# Altium PCB PCB1.PcbDoc
Units mm, origin at the board's own origin, x right, y up, seen from the top; angles counter-clockwise.
Board outline 43.94 x 44.83 mm, 2 copper layers (Top Layer, Bottom Layer); 126 components, 15 nets, 360 pads, 24 vias.
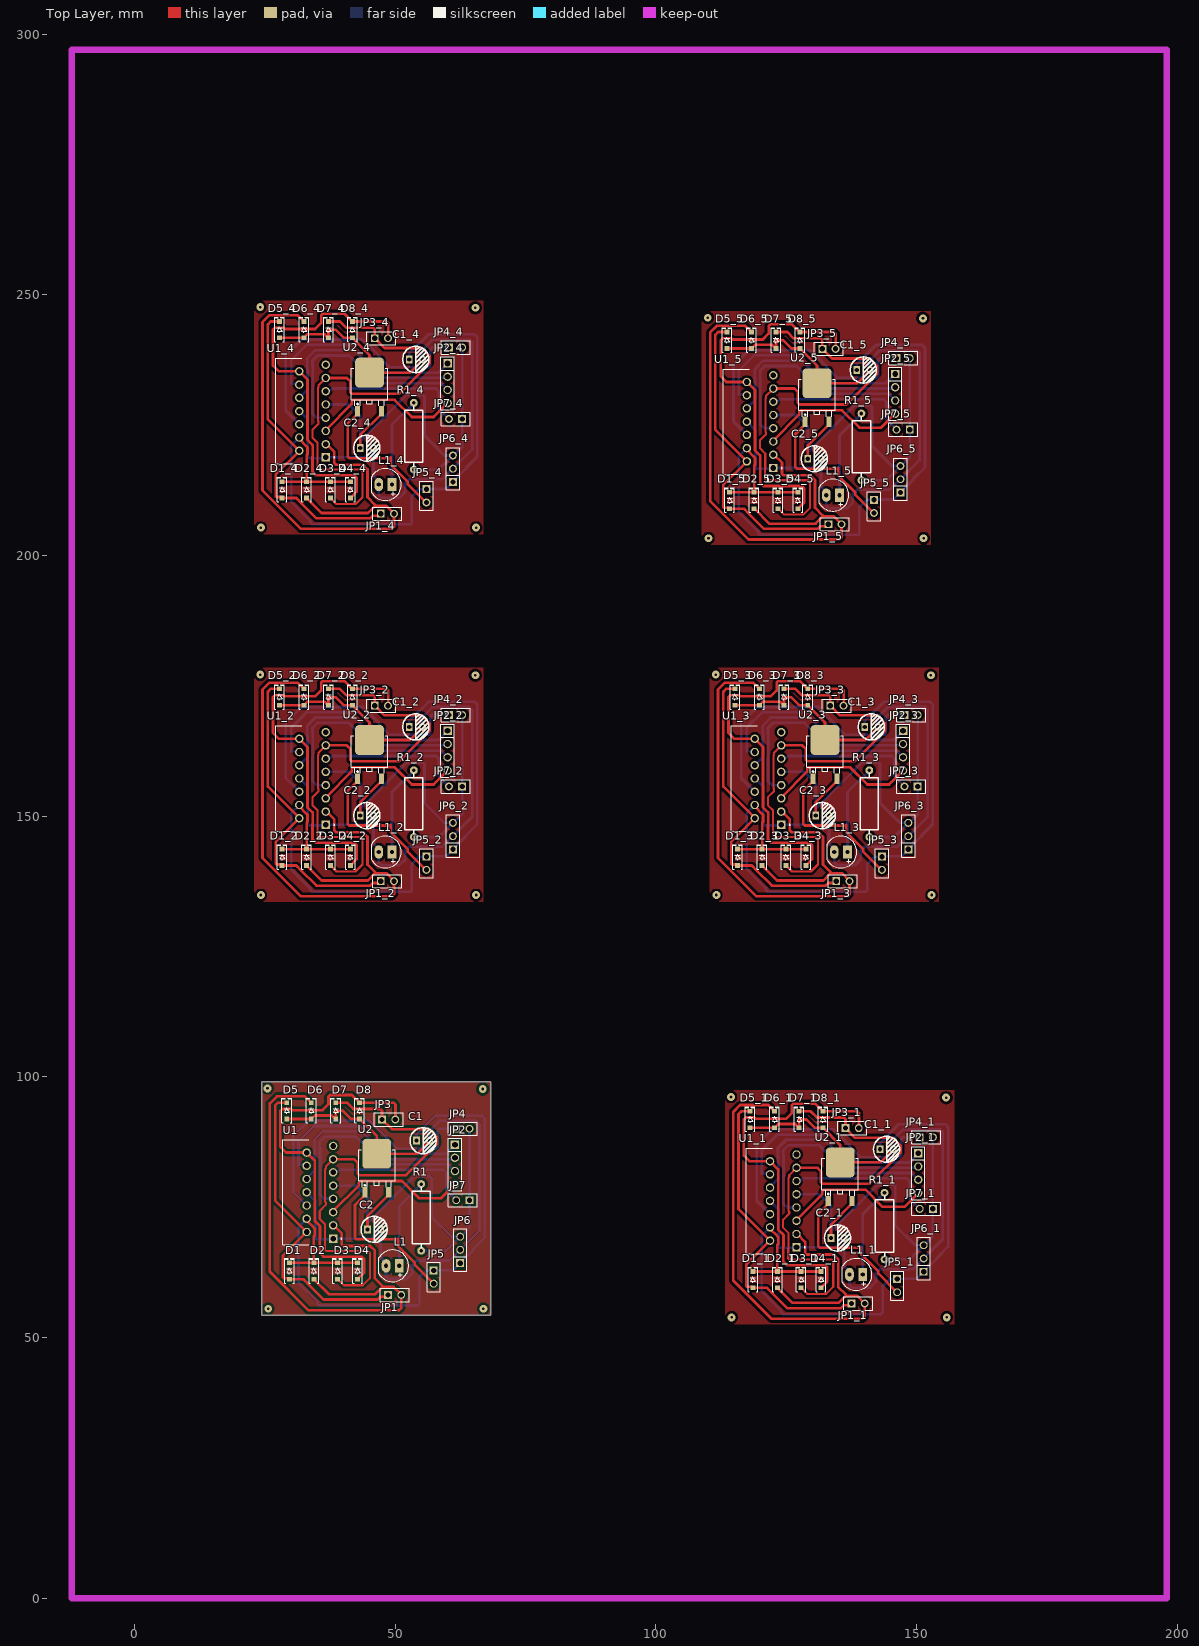
[diagram p0: Top Layer view]
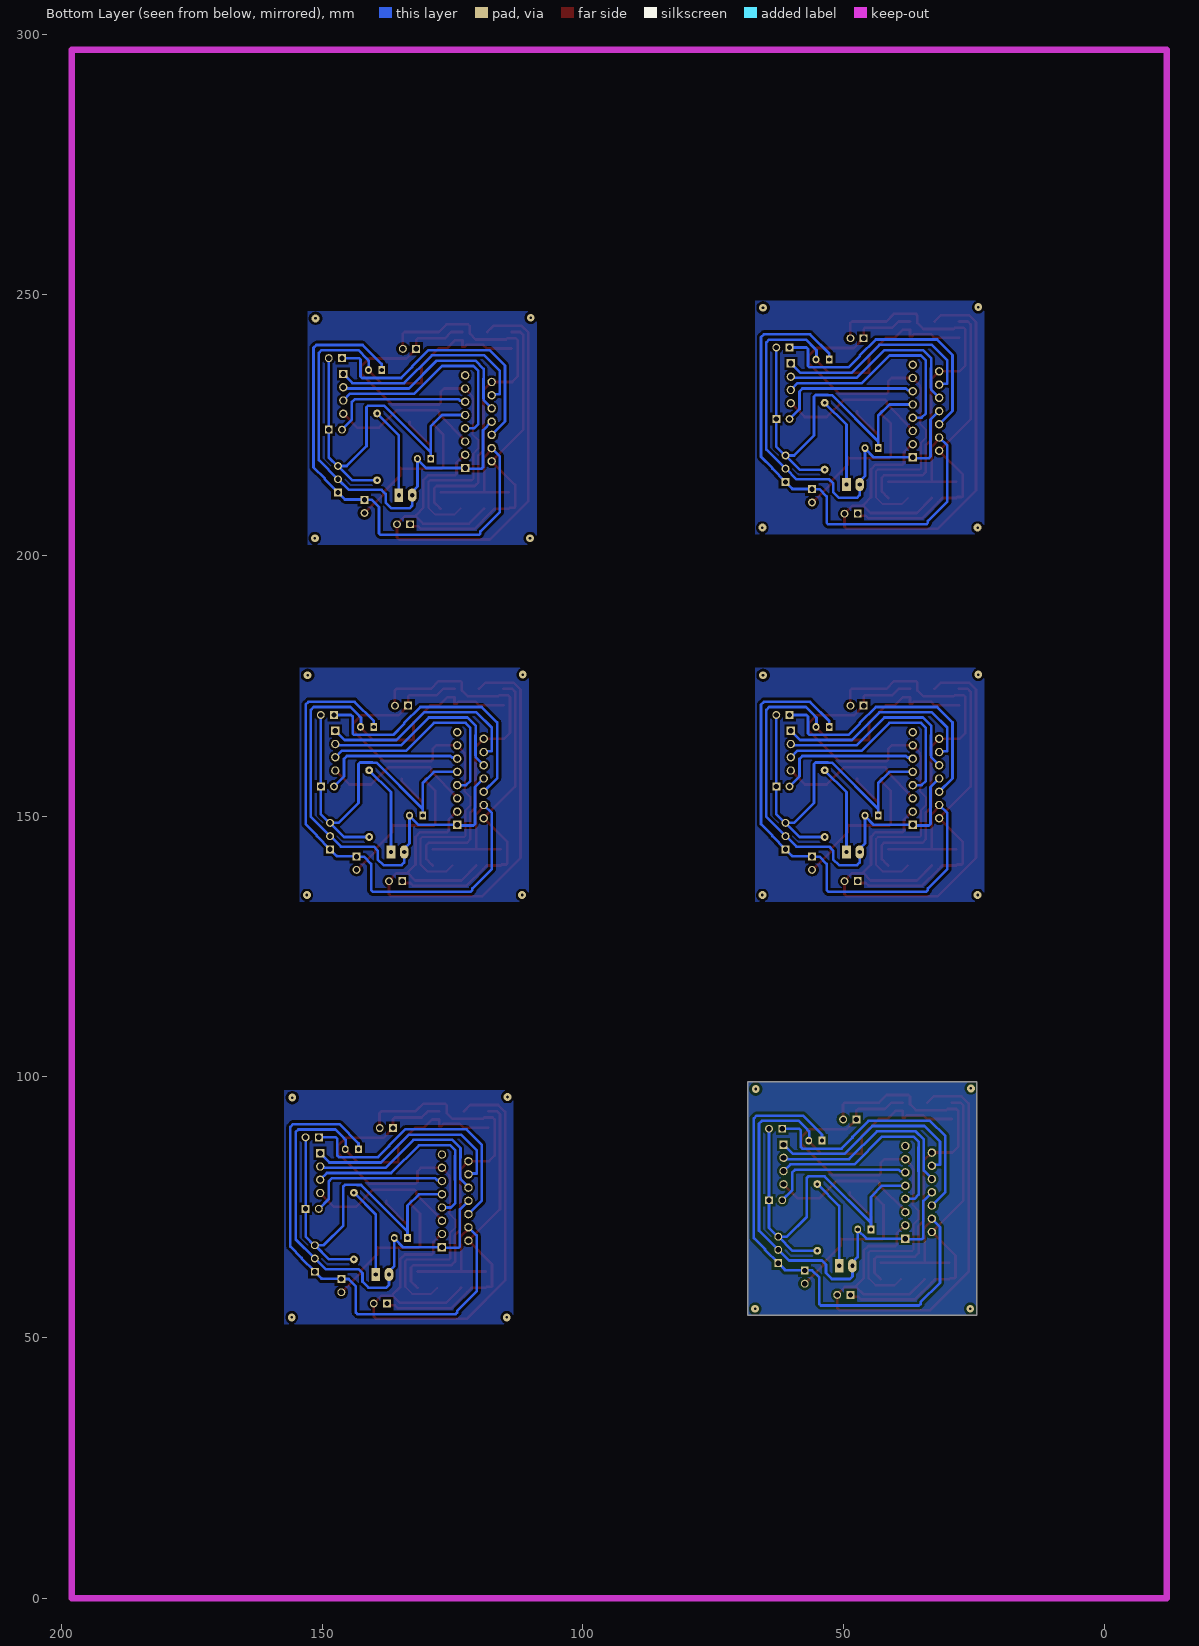
[diagram p1: Bottom Layer view, seen from below]

## Layer stack, top to bottom
Top Solder: solder mask 0.0102, Solder Resist, Dk 3.5
Top Layer: signal copper 0.0356
Dielectric 1: dielectric 0.32, FR-4, Dk 4.8
Bottom Layer: signal copper 0.0356
Bottom Solder: solder mask 0.0102, Solder Resist, Dk 3.5

## Board outline
24.384,54.229 24.384,99.06 68.326,99.06 68.326,54.229

## Design rules (kind name [scope] priority, off if disabled: settings)
Clearance [All] p1: gap=0.5 ignorepadtopadclearanceinfootprint=FALSE
PolygonConnect [All] p1: connectstyle=Relief reliefconductorwidth=0.254 reliefentries=4 polygonreliefangle="90 Angle" airgapwidth=0.254
RoutingVias [All] p1: holewidth=0.711 width=1.27 viastyle="Through Hole" minholewidth=0.711 minwidth=1.27 maxholewidth=0.711 maxwidth=1.27
SolderMaskExpansion [All] p1: expansion=0.102 istentingtop=FALSE
Width [All] p1: maxlimit=1.016 minlimit=0.254 preferedwidth=1.016
30 further rules are at their usual default settings.

## Classes and differential pairs
component class Sheet1: C1 C2 D1 D2 D3 D4 D5 D6 D7 D8 JP1 JP2 JP3 JP4 JP5 JP6 JP7 L1 R1 U1 U2

## Components (designator, comment, footprint, x,y, rotation, side; value= is the part's Value field where it differs from the comment)
C1 "220uF" "tu hoa 5mm" 55.372,87.757 r0 top
C1_1 "220uF" "tu hoa 5mm" 144.272,86.106 r0 top (schematic designator C1)
C1_2 "220uF" "tu hoa 5mm" 53.975,167.132 r0 top (schematic designator C1)
C1_3 "220uF" "tu hoa 5mm" 141.351,167.132 r0 top (schematic designator C1)
C1_4 "220uF" "tu hoa 5mm" 53.975,237.617 r0 top (schematic designator C1)
C1_5 "220uF" "tu hoa 5mm" 139.827,235.585 r0 top (schematic designator C1)
C2 "220uF" "tu hoa 5mm" 45.974,70.739 r0 top
C2_1 "220uF" "tu hoa 5mm" 134.874,69.088 r0 top (schematic designator C2)
C2_2 "220uF" "tu hoa 5mm" 44.577,150.114 r0 top (schematic designator C2)
C2_3 "220uF" "tu hoa 5mm" 131.953,150.114 r0 top (schematic designator C2)
C2_4 "220uF" "tu hoa 5mm" 44.577,220.599 r0 top (schematic designator C2)
C2_5 "220uF" "tu hoa 5mm" 130.429,218.567 r0 top (schematic designator C2)
D1 "S4" "DIODE SOD-123" 29.718,62.738 r90 top
D1_1 "S4" "DIODE SOD-123" 118.618,61.087 r90 top (schematic designator D1)
D1_2 "S4" "DIODE SOD-123" 28.321,142.113 r90 top (schematic designator D1)
D1_3 "S4" "DIODE SOD-123" 115.697,142.113 r90 top (schematic designator D1)
D1_4 "S4" "DIODE SOD-123" 28.321,212.598 r90 top (schematic designator D1)
D1_5 "S4" "DIODE SOD-123" 114.173,210.566 r90 top (schematic designator D1)
D2 "S4" "DIODE SOD-123" 34.417,62.738 r90 top
D2_1 "S4" "DIODE SOD-123" 123.317,61.087 r90 top (schematic designator D2)
D2_2 "S4" "DIODE SOD-123" 33.02,142.113 r90 top (schematic designator D2)
D2_3 "S4" "DIODE SOD-123" 120.396,142.113 r90 top (schematic designator D2)
D2_4 "S4" "DIODE SOD-123" 33.02,212.598 r90 top (schematic designator D2)
D2_5 "S4" "DIODE SOD-123" 118.872,210.566 r90 top (schematic designator D2)
D3 "S4" "DIODE SOD-123" 38.989,62.738 r90 top
D3_1 "S4" "DIODE SOD-123" 127.889,61.087 r90 top (schematic designator D3)
D3_2 "S4" "DIODE SOD-123" 37.592,142.113 r90 top (schematic designator D3)
D3_3 "S4" "DIODE SOD-123" 124.968,142.113 r90 top (schematic designator D3)
D3_4 "S4" "DIODE SOD-123" 37.592,212.598 r90 top (schematic designator D3)
D3_5 "S4" "DIODE SOD-123" 123.444,210.566 r90 top (schematic designator D3)
D4 "S4" "DIODE SOD-123" 42.799,62.738 r90 top
D4_1 "S4" "DIODE SOD-123" 131.699,61.087 r90 top (schematic designator D4)
D4_2 "S4" "DIODE SOD-123" 41.402,142.113 r90 top (schematic designator D4)
D4_3 "S4" "DIODE SOD-123" 128.778,142.113 r90 top (schematic designator D4)
D4_4 "S4" "DIODE SOD-123" 41.402,212.598 r90 top (schematic designator D4)
D4_5 "S4" "DIODE SOD-123" 127.254,210.566 r90 top (schematic designator D4)
D5 "S4" "DIODE SOD-123" 29.21,93.472 r90 top
D5_1 "S4" "DIODE SOD-123" 118.11,91.821 r90 top (schematic designator D5)
D5_2 "S4" "DIODE SOD-123" 27.813,172.847 r90 top (schematic designator D5)
D5_3 "S4" "DIODE SOD-123" 115.189,172.847 r90 top (schematic designator D5)
D5_4 "S4" "DIODE SOD-123" 27.813,243.332 r90 top (schematic designator D5)
D5_5 "S4" "DIODE SOD-123" 113.665,241.3 r90 top (schematic designator D5)
D6 "S4" "DIODE SOD-123" 33.909,93.472 r90 top
D6_1 "S4" "DIODE SOD-123" 122.809,91.821 r90 top (schematic designator D6)
D6_2 "S4" "DIODE SOD-123" 32.512,172.847 r90 top (schematic designator D6)
D6_3 "S4" "DIODE SOD-123" 119.888,172.847 r90 top (schematic designator D6)
D6_4 "S4" "DIODE SOD-123" 32.512,243.332 r90 top (schematic designator D6)
D6_5 "S4" "DIODE SOD-123" 118.364,241.3 r90 top (schematic designator D6)
D7 "S4" "DIODE SOD-123" 38.608,93.472 r90 top
D7_1 "S4" "DIODE SOD-123" 127.508,91.821 r90 top (schematic designator D7)
D7_2 "S4" "DIODE SOD-123" 37.211,172.847 r90 top (schematic designator D7)
D7_3 "S4" "DIODE SOD-123" 124.587,172.847 r90 top (schematic designator D7)
D7_4 "S4" "DIODE SOD-123" 37.211,243.332 r90 top (schematic designator D7)
D7_5 "S4" "DIODE SOD-123" 123.063,241.3 r90 top (schematic designator D7)
D8 "S4" "DIODE SOD-123" 43.18,93.472 r90 top
D8_1 "S4" "DIODE SOD-123" 132.08,91.821 r90 top (schematic designator D8)
D8_2 "S4" "DIODE SOD-123" 41.783,172.847 r90 top (schematic designator D8)
D8_3 "S4" "DIODE SOD-123" 129.159,172.847 r90 top (schematic designator D8)
D8_4 "S4" "DIODE SOD-123" 41.783,243.332 r90 top (schematic designator D8)
D8_5 "S4" "DIODE SOD-123" 127.635,241.3 r90 top (schematic designator D8)
JP1 "JP 1x2 2.54" "JP 1x2 CT" 48.641,58.166 r0 top
JP1_1 "JP 1x2 2.54" "JP 1x2 CT" 137.541,56.515 r0 top (schematic designator JP1)
JP1_2 "JP 1x2 2.54" "JP 1x2 CT" 47.244,137.541 r0 top (schematic designator JP1)
JP1_3 "JP 1x2 2.54" "JP 1x2 CT" 134.62,137.541 r0 top (schematic designator JP1)
JP1_4 "JP 1x2 2.54" "JP 1x2 CT" 47.244,208.026 r0 top (schematic designator JP1)
JP1_5 "JP 1x2 2.54" "JP 1x2 CT" 133.096,205.994 r0 top (schematic designator JP1)
JP2 "JP 1x4 2.54" "JP 1x4 DT" 61.468,86.995 r270 top
JP2_1 "JP 1x4 2.54" "JP 1x4 DT" 150.368,85.344 r270 top (schematic designator JP2)
JP2_2 "JP 1x4 2.54" "JP 1x4 DT" 60.071,166.37 r270 top (schematic designator JP2)
JP2_3 "JP 1x4 2.54" "JP 1x4 DT" 147.447,166.37 r270 top (schematic designator JP2)
JP2_4 "JP 1x4 2.54" "JP 1x4 DT" 60.071,236.855 r270 top (schematic designator JP2)
JP2_5 "JP 1x4 2.54" "JP 1x4 DT" 145.923,234.823 r270 top (schematic designator JP2)
JP3 "JP 1x2 2.54" "JP 1x2 CT" 47.498,91.821 r0 top
JP3_1 "JP 1x2 2.54" "JP 1x2 CT" 136.398,90.17 r0 top (schematic designator JP3)
JP3_2 "JP 1x2 2.54" "JP 1x2 CT" 46.101,171.196 r0 top (schematic designator JP3)
JP3_3 "JP 1x2 2.54" "JP 1x2 CT" 133.477,171.196 r0 top (schematic designator JP3)
JP3_4 "JP 1x2 2.54" "JP 1x2 CT" 46.101,241.681 r0 top (schematic designator JP3)
JP3_5 "JP 1x2 2.54" "JP 1x2 CT" 131.953,239.649 r0 top (schematic designator JP3)
JP4 "JP 1x2 2.54" "JP 1x2 CT" 61.722,90.043 r0 top
JP4_1 "JP 1x2 2.54" "JP 1x2 CT" 150.622,88.392 r0 top (schematic designator JP4)
JP4_2 "JP 1x2 2.54" "JP 1x2 CT" 60.325,169.418 r0 top (schematic designator JP4)
JP4_3 "JP 1x2 2.54" "JP 1x2 CT" 147.701,169.418 r0 top (schematic designator JP4)
JP4_4 "JP 1x2 2.54" "JP 1x2 CT" 60.325,239.903 r0 top (schematic designator JP4)
JP4_5 "JP 1x2 2.54" "JP 1x2 CT" 146.177,237.871 r0 top (schematic designator JP4)
JP5 "JP 1x2 2.54" "JP 1x2 CT" 57.404,62.865 r270 top
JP5_1 "JP 1x2 2.54" "JP 1x2 CT" 146.304,61.214 r270 top (schematic designator JP5)
JP5_2 "JP 1x2 2.54" "JP 1x2 CT" 56.007,142.24 r270 top (schematic designator JP5)
JP5_3 "JP 1x2 2.54" "JP 1x2 CT" 143.383,142.24 r270 top (schematic designator JP5)
JP5_4 "JP 1x2 2.54" "JP 1x2 CT" 56.007,212.725 r270 top (schematic designator JP5)
JP5_5 "JP 1x2 2.54" "JP 1x2 CT" 141.859,210.693 r270 top (schematic designator JP5)
JP6 "JP 1x3 2.54" "JP 1x3 CT" 62.484,64.262 r90 top
JP6_1 "JP 1x3 2.54" "JP 1x3 CT" 151.384,62.611 r90 top (schematic designator JP6)
JP6_2 "JP 1x3 2.54" "JP 1x3 CT" 61.087,143.637 r90 top (schematic designator JP6)
JP6_3 "JP 1x3 2.54" "JP 1x3 CT" 148.463,143.637 r90 top (schematic designator JP6)
JP6_4 "JP 1x3 2.54" "JP 1x3 CT" 61.087,214.122 r90 top (schematic designator JP6)
JP6_5 "JP 1x3 2.54" "JP 1x3 CT" 146.939,212.09 r90 top (schematic designator JP6)
JP7 "JP 1x2 2.54" "JP 1x2 CT" 64.262,76.327 r180 top
JP7_1 "JP 1x2 2.54" "JP 1x2 CT" 153.162,74.676 r180 top (schematic designator JP7)
JP7_2 "JP 1x2 2.54" "JP 1x2 CT" 62.865,155.702 r180 top (schematic designator JP7)
JP7_3 "JP 1x2 2.54" "JP 1x2 CT" 150.241,155.702 r180 top (schematic designator JP7)
JP7_4 "JP 1x2 2.54" "JP 1x2 CT" 62.865,226.187 r180 top (schematic designator JP7)
JP7_5 "JP 1x2 2.54" "JP 1x2 CT" 148.717,224.155 r180 top (schematic designator JP7)
L1 "LED 5mm" LED-5MM-RED 50.8,63.754 r180 top
L1_1 "LED 5mm" LED-5MM-RED 139.7,62.103 r180 top (schematic designator L1)
L1_2 "LED 5mm" LED-5MM-RED 49.403,143.129 r180 top (schematic designator L1)
L1_3 "LED 5mm" LED-5MM-RED 136.779,143.129 r180 top (schematic designator L1)
L1_4 "LED 5mm" LED-5MM-RED 49.403,213.614 r180 top (schematic designator L1)
L1_5 "LED 5mm" LED-5MM-RED 135.255,211.582 r180 top (schematic designator L1)
R1 "1k" "tro vach 1/2w" 54.991,73.025 r270 top
R1_1 "1k" "tro vach 1/2w" 143.891,71.374 r270 top (schematic designator R1)
R1_2 "1k" "tro vach 1/2w" 53.594,152.4 r270 top (schematic designator R1)
R1_3 "1k" "tro vach 1/2w" 140.97,152.4 r270 top (schematic designator R1)
R1_4 "1k" "tro vach 1/2w" 53.594,222.885 r270 top (schematic designator R1)
R1_5 "1k" "tro vach 1/2w" 139.446,220.853 r270 top (schematic designator R1)
U1 "L298N" TO127P2020X500X2100-15 38.1,68.961 r180 top
U1_1 "L298N" TO127P2020X500X2100-15 127,67.31 r180 top (schematic designator U1)
U1_2 "L298N" TO127P2020X500X2100-15 36.703,148.336 r180 top (schematic designator U1)
U1_3 "L298N" TO127P2020X500X2100-15 124.079,148.336 r180 top (schematic designator U1)
U1_4 "L298N" TO127P2020X500X2100-15 36.703,218.821 r180 top (schematic designator U1)
U1_5 "L298N" TO127P2020X500X2100-15 122.555,216.789 r180 top (schematic designator U1)
U2 "78M05 SMD TO252" TO252 46.482,81.534 r0 top
U2_1 "78M05 SMD TO252" TO252 135.382,79.883 r0 top (schematic designator U2)
U2_2 "78M05 SMD TO252" TO252 45.085,160.909 r0 top (schematic designator U2)
U2_3 "78M05 SMD TO252" TO252 132.461,160.909 r0 top (schematic designator U2)
U2_4 "78M05 SMD TO252" TO252 45.085,231.394 r0 top (schematic designator U2)
U2_5 "78M05 SMD TO252" TO252 130.937,229.362 r0 top (schematic designator U2)

## Footprints (in the part's own frame and the unit in brackets; to place one, negate y for a bottom-side part, rotate by r counter-clockwise, add the part's x,y. Pads: shape width x height; smd on the part's side, far side on the other; paste and mask are expansions set on the pad)
"DIODE SOD-123" [mm] "SOD-123"
  rect 0.9x0.95 smd: 1(-1.575,0) 2(1.575,0)
  silkscreen extent -2.3,-0.92 2.41,0.92, body extent -1.86,-0.78 1.86,0.77, height 1.35
"JP 1x2 CT" [mm] "JP 1x2 CT"
  rect 1.52x1.52 hole 1.02: 1(0,0)
  round 1.52 hole 1.02: 2(2.54,0)
  silkscreen extent -1.52,-1.27 4.06,1.27, body extent -1.52,-1.25 4.06,1.25, height 8.51
"JP 1x3 CT" [mm]
  rect 1.52x1.52 hole 1.02: 1(0,0)
  round 1.52 hole 1.02: 2(2.54,0) 3(5.08,0)
  silkscreen extent -1.52,-1.27 6.6,1.27, body extent -1.52,-1.25 6.6,1.25, height 8.51
"JP 1x4 DT" [mm] "4 pins, 1 row, straight, gold plating"
  rect 1.6x1.6 hole 1.1: 1(0,0)
  round 1.6 hole 1.1: 2(2.54,0) 3(5.08,0) 4(7.62,0)
  silkscreen extent -1.27,-1.27 8.89,1.27, body extent -1.27,-1.27 8.89,1.27, height 8.54
LED-5MM-RED [mil] "LED 2 PIN, 5 ly , Only colour,pin to pin 100mil"
  rect 65x100 hole 32: 1(0,0)
  oval 65x100 hole 32: 2(100,0)
  silkscreen extent -70,-120 154,120, body extent -65,-119 149,118, height 339
TO127P2020X500X2100-15 [mm]
  rect 1.62x1.62 hole 1.08: 1(0,0)
  round 1.62 hole 1.08: 2(5.08,-1.27) 3(0,-2.54) 4(5.08,-3.81) 5(0,-5.08) 6(5.08,-6.35) 7(0,-7.62) 8(5.08,-8.89) 9(0,-10.16) 10(5.08,-11.43) 11(0,-12.7) 12(5.08,-13.97) 13(0,-15.24) 14(5.08,-16.51) 15(0,-17.78)
  silkscreen extent -1.69,-18.99 9.63,1.21
TO252 [mm] "TO252"
  round 0.5 on Mech15: 0(0,0)
  rrect25% 1x2 smd: 1(-2.285,-3.7) 3(2.285,-3.7)
  rrect25% 5.5x5.7 smd: 2(0,3.7)
  silkscreen extent -3.5,-2.7 3.5,4.5, body extent -3.3,-3.95 3.3,5.76, height 2.31
"tro vach 1/2w" [mm]
  round 1.5 hole 0.7: 1(-6.4,0) 2(6.4,0)
  silkscreen extent -5.84,-1.75 5.84,1.75, body extent -6.62,-1.75 6.62,1.75, height 3.5
"tu hoa 5mm" [mm]
  rect 1.3x1.5 hole 0.8: 1(-1.27,0)
  oval 1.3x1.5 hole 0.8: 2(1.27,0)
  silkscreen extent -2.51,-2.51 2.51,2.51, body extent -3.12,-3.18 3.23,3.18, height 14.55

## Part data
C1 C1_1 C1_2 C1_3 C1_4 C1_5 C2 C2_1 C2_2 C2_3 C2_4 C2_5: library part "Tu Hoa 100uF 16V 5x7", "Cắm", Chung_Loai=Cắm, Don_Vi=Con, Ma_Hang=MH001347, So_Chan=2, Ten_Linh_Kien="Tụ Hóa 100uF 16V 5x7MM"
D1 D1_1 D1_2 D1_3 D1_4 D1_5 D2 D2_1 D2_2 D2_3 D2_4 D2_5 D3 D3_1 D3_2 D3_3 D3_4 D3_5 D4 D4_1 D4_2 D4_3 D4_4 D4_5 D5 D5_1 D5_2 D5_3 D5_4 D5_5 D6 D6_1 D6_2 D6_3 D6_4 D6_5 D7 D7_1 D7_2 D7_3 D7_4 D7_5 D8 D8_1 D8_2 D8_3 D8_4 D8_5: library part "Diode S4", "Dán", Chung_Loai=Dán, Don_Vi=Con, Ma_Hang=MH005519, Ten_Linh_Kien="Diode S4 SOD123 ( 1N5819 SOD123)"
JP1 JP1_1 JP1_2 JP1_3 JP1_4 JP1_5 JP3 JP3_1 JP3_2 JP3_3 JP3_4 JP3_5 JP4 JP4_1 JP4_2 JP4_3 JP4_4 JP4_5 JP5 JP5_1 JP5_2 JP5_3 JP5_4 JP5_5 JP7 JP7_1 JP7_2 JP7_3 JP7_4 JP7_5: library part "JP 1x2 2.54 Cai Thang", "Cắm", Chung_Loai=Cắm, Don_Vi=Con, Ma_Hang=MH004006, Ten_Linh_Kien="Jump Đơn Cái 2.54MM 1x20P Thẳng"
JP2 JP2_1 JP2_2 JP2_3 JP2_4 JP2_5: library part "JP 1x4 2.54 Duc Thang", "Cắm", Chung_Loai=Cắm, Don_Vi=Con, Ma_Hang=MH000903, Ten_Linh_Kien="Jump Đơn Đực 2.54MM 1x40P Thẳng 11MM"
JP6 JP6_1 JP6_2 JP6_3 JP6_4 JP6_5: library part "JP 1x3 2.54 Cai Thang", "Cắm", Chung_Loai=Cắm, Don_Vi=Con, Ma_Hang=MH004006, Ten_Linh_Kien="Jump Đơn Cái 2.54MM 1x20P Thẳng"
L1 L1_1 L1_2 L1_3 L1_4 L1_5: library part "LED 5mm Do", "Cắm", Chung_Loai=Cắm, Don_Vi=Con, Ma_Hang=MH008967, Ten_Linh_Kien="Led 5MM Phủ Đỏ (1000c)"
R1 R1_1 R1_2 R1_3 R1_4 R1_5: library part "Tro Vach 1/2W 5% 270R", "Cắm", Chung_Loai=Cắm, Don_Vi=Con, Ma_Hang=MH006192, So_Chan=2, Ten_Linh_Kien="Trở 5% 1/2w 270R"
U1 U1_1 U1_2 U1_3 U1_4 U1_5: "Dual Full Bridge Motor Driver 15-Pin(15+Tab) MULTIWATT V Tube", Package=None, Availability=Unavailable, MP=L298N, Price=None
U2 U2_1 U2_2 U2_3 U2_4 U2_5: "Dán", Chung_Loai=Dán, Don_Vi=Con, Ma_Hang=MH001917, Ten_Linh_Kien="78M05 TO252"

## Via types
v1: diameter 1.5, hole 0.5, Top Layer to Bottom Layer, 24 vias

## Nets (pads, with @x,y where several pads share a name; then routed paths per layer and width w, separated by ;. In a path a pad name is that pad's centre, name@x,y a point inside that pad or via, vN(x,y) a via of type N, cw(c..) or ccw(c..) an arc to the next point about the centre after c; other vN are vias at no path point)
+5: C2.1 JP4.2 JP6.3 JP7.1 R1.2 U1.9 U2.3 | length 83.3
  Top Layer w0.508: C2.1 44.704,73.271 48.767,77.334 U2.3
  Bottom Layer w0.508: U1.9 42.545,79.121 44.704,76.962 44.704,72.009 ; C2.1 44.704,72.009 ; R1.2 59.767,66.625 JP6.3 ; JP4.2 JP7.1 64.262,70.993 62.611,69.342 JP6.3 ; 44.704,72.009 53.594,80.899 54.338,80.899 54.368,80.929 56.695,80.929 57.023,80.601 57.023,73.152 60.833,69.342 JP6.3
ENA: JP4.1 U1.6 | length 52.6
  Bottom Layer w0.508: U1.6 30.448,77.883 30.448,88.614 33.401,91.567 45.166,91.567 48.26,88.473 48.26,88.339 50.366,86.233 57.868,86.233 58.166,86.531 58.166,89.745 58.464,90.043 JP4.1
ENB: JP7.2 U1.11 | length 28.2
  Bottom Layer w0.508: U1.11 38.313,81.874 39.075,81.874 39.37,82.169 59.265,82.169 59.817,81.617 59.817,78.232 JP7.2
GND: C1.2 C2.2 D5.1 D6.1 D7.1 D8.1 JP6.2 L1.2 U1.1 U1.8 U2.2 | length 123.9
  Top Layer w0.508: D5.1 D6.1 33.934,91.897 34.628,92.591 37.838,92.591 38.227,92.202 38.608,92.202 38.608,93.472 39.996,93.472 41.571,91.897 D8.1 43.205,91.897 46.482,88.62 U2.2 54.219,85.234 56.642,87.657 C1.2
  Bottom Layer w0.508: U1.8 34.671,76.2 34.671,69.132 34.969,68.834 37.973,68.834 U1.1 45.566,68.961 C2.2@47.244,70.639 ; C2.2 C2.2@47.244,70.639 ; C1.2 56.559,87.84 56.559,89.535 56.598,89.535 56.896,89.833 56.896,89.901 58.552,91.557 65.641,91.557 66.175,91.023 66.175,70.493 JP6.2 62.438,66.802 60.406,64.77 54.102,64.77 53.34,64.008 53.34,62.357 52.197,61.214 48.768,61.214 48.26,61.722 L1.2 48.26,64.389 47.244,65.405 C2.2@47.244,70.639
NetD1_1: D1.1 D5.2 JP1.1 U1.2 | length 62.1
  Top Layer w0.508: D5.2 27.527,95.047 26.973,94.493 26.973,76.278 U1.2 28.489,65.7 28.489,61.512 28.642,61.359 29.522,61.359 D1.1 32.436,61.163 32.638,60.961 33.188,60.411 33.188,60.401 36.304,57.285 46.599,57.285 47.119,57.805 48.28,57.805 JP1.1
NetD2_1: D2.1 D6.2 JP1.2 U1.3 | length 110.3
  Top Layer w0.508: D6.2 33.884,95.047 32.68,96.251 27.305,96.251 25.965,94.911 25.965,62.61 33.33,55.245 50.756,55.245 51.181,55.67 JP1.2 51.181,58.212 49.713,59.68 47.569,59.68 ; D2.1 34.442,61.163 37.312,58.293 46.182,58.293 47.569,59.68 ; U1.3 38.246,71.501 39.751,69.996 39.751,67.857 40.049,67.56 45.216,67.56 46.101,66.675 46.101,61.341 47.569,59.873 47.569,59.68
NetD3_1: D3.1 D7.2 JP3.1 U1.13 | length 89.4
  Top Layer w0.4: U1.13 36.703,82.804 36.703,82.399 36.59,82.286 36.59,75.956 36.703,75.843 36.703,75.433 35.538,74.268 35.538,72.727 36.546,71.719 36.546,68.77 36.514,68.738 36.514,66.84 36.748,66.606 44.821,66.606 45.147,66.28 45.147,61.355 43.805,60.013 40.164,60.013 39.014,61.163 D3.1
  Top Layer w0.508: U1.13 42.12,84.201 42.799,83.522 42.799,81.451 43.097,81.153 52.124,81.153 58.046,87.075 58.046,88.011 58.039,88.018 58.039,88.446 56.522,89.962 49.357,89.962 JP3.1 47.498,93.545 47.2,93.843 42,93.843 40.796,95.047 D7.2
NetD4_1: D4.1 D8.2 JP3.2 U1.14 | length 74.2
  Top Layer w0.508: D4.1 42.824,61.163 43.02,61.359 43.02,61.384 44.028,62.392 44.028,65.075 43.586,65.517 36.254,65.517 35.56,66.211 35.56,69.134 35.592,69.166 35.592,71.296 35.56,71.328 35.56,71.356 34.584,72.332 34.584,74.663 34.584,83.907 U1.14 29.083,85.471 27.981,86.573 27.981,93.459 28.365,93.843 29.997,93.843 30.241,93.599 36.068,93.599 37.211,94.742 37.211,96.222 37.509,96.52 41.682,96.52 43.155,95.047 D8.2 49.733,95.047 50.082,94.698 50.082,91.865 JP3.2
NetJP2_1: JP2.1 U1.12 | length 40.3
  Bottom Layer w0.508: U1.12 32.849,83.102 31.456,83.102 31.456,87.59 34.425,90.559 44.45,90.559 49.784,85.225 59.698,85.225 JP2.1
NetJP2_2: JP2.2 U1.10 | length 38.1
  Bottom Layer w0.508: U1.10 33.02,80.485 34.552,82.017 34.552,82.251 34.584,82.283 34.584,86.119 34.552,86.151 34.552,87.991 36.112,89.551 43.545,89.551 48.879,84.217 60.624,84.217 60.653,84.246 61.259,84.246 JP2.2
NetJP2_3: JP2.3 U1.7 | length 42.1
  Bottom Layer w0.508: U1.7 36.366,76.581 35.56,77.387 35.56,81.883 35.592,81.915 35.592,86.536 35.56,86.568 35.56,87.574 36.505,88.519 42.545,88.519 47.855,83.209 60.174,83.209 JP2.3
NetJP2_4: JP2.4 U1.5 | length 28.7
  Top Layer w0.508: U1.5 38.1,74.23 43.053,79.183 43.053,79.712 43.351,80.01 51.308,80.01 54.61,76.708 58.801,76.708 JP2.4
NetJP5_2: JP5.2 U2.1 | length 29.4
  Top Layer w0.508: U2.1 44.197,77.334 42.301,75.438 42.301,69.132 42.599,68.834 50.419,68.834 50.546,68.961 50.546,67.564 53.798,64.312 53.798,63.885 57.358,60.325 JP5.2
NetL1_1: L1.1 R1.1 | length 17.4
  Bottom Layer w0.508: L1.1 50.8,75.234 R1.1
VCC: C1.1 D1.2 D2.2 D3.2 D4.2 JP5.1 JP6.1 U1.4 | length 120.3
  Top Layer w0.508: D1.2 D2.2 ; U1.4 33.02,72.47 34.417,71.073 34.417,71.046 34.584,70.879 34.584,69.583 34.417,69.416 D2.2 ; D4.2 D3.2 D2.2
  Bottom Layer w0.508: U1.4 31.456,71.207 31.456,60.492 35.179,56.769 35.179,56.432 35.477,56.134 54.312,56.134 54.61,56.432 54.61,61.468 56.007,62.865 JP5.1 57.448,62.909 61.214,62.909 61.214,62.992 JP6.1 65.024,66.802 65.024,66.929 67.183,69.088 67.183,92.031 66.649,92.565 57.767,92.565 54.102,88.9 C1.1
pads on no net: C1_1.1 C1_1.2 C1_2.1 C1_2.2 C1_3.1 C1_3.2 C1_4.1 C1_4.2 C1_5.1 C1_5.2 C2_1.1 C2_1.2 C2_2.1 C2_2.2 C2_3.1 C2_3.2 C2_4.1 C2_4.2 C2_5.1 C2_5.2 D1_1.1 D1_1.2 D1_2.1 D1_2.2 D1_3.1 D1_3.2 D1_4.1 D1_4.2 D1_5.1 D1_5.2 D2_1.1 D2_1.2 D2_2.1 D2_2.2 D2_3.1 D2_3.2 D2_4.1 D2_4.2 D2_5.1 D2_5.2 D3_1.1 D3_1.2 D3_2.1 D3_2.2 D3_3.1 D3_3.2 D3_4.1 D3_4.2 D3_5.1 D3_5.2 D4_1.1 D4_1.2 D4_2.1 D4_2.2 D4_3.1 D4_3.2 D4_4.1 D4_4.2 D4_5.1 D4_5.2 D5_1.1 D5_1.2 D5_2.1 D5_2.2 D5_3.1 D5_3.2 D5_4.1 D5_4.2 D5_5.1 D5_5.2 D6_1.1 D6_1.2 D6_2.1 D6_2.2 D6_3.1 D6_3.2 D6_4.1 D6_4.2 D6_5.1 D6_5.2 D7_1.1 D7_1.2 D7_2.1 D7_2.2 D7_3.1 D7_3.2 D7_4.1 D7_4.2 D7_5.1 D7_5.2 D8_1.1 D8_1.2 D8_2.1 D8_2.2 D8_3.1 D8_3.2 D8_4.1 D8_4.2 D8_5.1 D8_5.2 JP1_1.1 JP1_1.2 JP1_2.1 JP1_2.2 JP1_3.1 JP1_3.2 JP1_4.1 JP1_4.2 JP1_5.1 JP1_5.2 JP2_1.1 JP2_1.2 JP2_1.3 JP2_1.4 JP2_2.1 JP2_2.2 JP2_2.3 JP2_2.4 JP2_3.1 JP2_3.2 JP2_3.3 JP2_3.4 JP2_4.1 JP2_4.2 JP2_4.3 JP2_4.4 JP2_5.1 JP2_5.2 JP2_5.3 JP2_5.4 JP3_1.1 JP3_1.2 JP3_2.1 JP3_2.2 JP3_3.1 JP3_3.2 JP3_4.1 JP3_4.2 JP3_5.1 JP3_5.2 JP4_1.1 JP4_1.2 JP4_2.1 JP4_2.2 JP4_3.1 JP4_3.2 JP4_4.1 JP4_4.2 JP4_5.1 JP4_5.2 JP5_1.1 JP5_1.2 JP5_2.1 JP5_2.2 JP5_3.1 JP5_3.2 JP5_4.1 JP5_4.2 JP5_5.1 JP5_5.2 JP6_1.1 JP6_1.2 JP6_1.3 JP6_2.1 JP6_2.2 JP6_2.3 JP6_3.1 JP6_3.2 JP6_3.3 JP6_4.1 JP6_4.2 JP6_4.3 JP6_5.1 JP6_5.2 JP6_5.3 JP7_1.1 JP7_1.2 JP7_2.1 JP7_2.2 JP7_3.1 JP7_3.2 JP7_4.1 JP7_4.2 JP7_5.1 JP7_5.2 L1_1.1 L1_1.2 L1_2.1 L1_2.2 L1_3.1 L1_3.2 L1_4.1 L1_4.2 L1_5.1 L1_5.2 R1_1.1 R1_1.2 R1_2.1 R1_2.2 R1_3.1 R1_3.2 R1_4.1 R1_4.2 R1_5.1 R1_5.2 U1.15 U1_1.1 U1_1.2 U1_1.3 U1_1.4 U1_1.5 U1_1.6 U1_1.7 U1_1.8 U1_1.9 U1_1.10 U1_1.11 U1_1.12 U1_1.13 U1_1.14 U1_1.15 U1_2.1 U1_2.2 U1_2.3 U1_2.4 U1_2.5 U1_2.6 U1_2.7 U1_2.8 U1_2.9 U1_2.10 U1_2.11 U1_2.12 U1_2.13 U1_2.14 U1_2.15 U1_3.1 U1_3.2 U1_3.3 U1_3.4 U1_3.5 U1_3.6 U1_3.7 U1_3.8 U1_3.9 U1_3.10 U1_3.11 U1_3.12 U1_3.13 U1_3.14 U1_3.15 U1_4.1 U1_4.2 U1_4.3 U1_4.4 U1_4.5 U1_4.6 U1_4.7 U1_4.8 U1_4.9 U1_4.10 U1_4.11 U1_4.12 U1_4.13 U1_4.14 U1_4.15 U1_5.1 U1_5.2 U1_5.3 U1_5.4 U1_5.5 U1_5.6 U1_5.7 U1_5.8 U1_5.9 U1_5.10 U1_5.11 U1_5.12 U1_5.13 U1_5.14 U1_5.15 U2.0 U2_1.0 U2_1.1 U2_1.2 U2_1.3 U2_2.0 U2_2.1 U2_2.2 U2_2.3 U2_3.0 U2_3.1 U2_3.2 U2_3.3 U2_4.0 U2_4.1 U2_4.2 U2_4.3 U2_5.0 U2_5.1 U2_5.2 U2_5.3
copper on no net: | length 4701.7
  Top Layer w0.4: 36.703,163.576 35.306,162.179 35.306,161.774 35.193,161.661 35.193,155.331 35.306,155.218 35.306,154.808 34.141,153.643 34.141,152.102 35.149,151.094 35.149,148.145 35.117,148.113 35.117,146.215 35.351,145.981 43.424,145.981 43.75,145.655 43.75,140.73 42.408,139.388 38.767,139.388 37.617,140.538 37.592,140.538 ; 36.703,234.061 35.306,232.664 35.306,232.259 35.193,232.146 35.193,225.816 35.306,225.703 35.306,225.293 34.141,224.128 34.141,222.587 35.149,221.579 35.149,218.63 35.117,218.598 35.117,216.7 35.351,216.466 43.424,216.466 43.75,216.14 43.75,211.215 42.408,209.873 38.767,209.873 37.617,211.023 37.592,211.023 ; 122.555,232.029 121.158,230.632 121.158,230.227 121.045,230.114 121.045,223.784 121.158,223.671 121.158,223.261 119.993,222.096 119.993,220.555 121.001,219.547 121.001,216.598 120.969,216.566 120.969,214.668 121.203,214.434 129.276,214.434 129.602,214.108 129.602,209.183 128.26,207.841 124.619,207.841 123.469,208.991 123.444,208.991 ; 124.079,163.576 122.682,162.179 122.682,161.774 122.569,161.661 122.569,155.331 122.682,155.218 122.682,154.808 121.517,153.643 121.517,152.102 122.525,151.094 122.525,148.145 122.493,148.113 122.493,146.215 122.727,145.981 130.8,145.981 131.126,145.655 131.126,140.73 129.784,139.388 126.143,139.388 124.993,140.538 124.968,140.538 ; 127,82.55 125.603,81.153 125.603,80.748 125.49,80.635 125.49,74.305 125.603,74.192 125.603,73.782 124.438,72.617 124.438,71.076 125.446,70.068 125.446,67.119 125.414,67.087 125.414,65.189 125.648,64.955 133.721,64.955 134.047,64.629 134.047,59.704 132.705,58.362 129.064,58.362 127.914,59.512 127.889,59.512
  Top Layer w0.508: 27.813,171.272 32.512,171.272 32.537,171.272 33.231,171.966 36.441,171.966 36.83,171.577 37.211,171.577 37.211,172.847 38.599,172.847 40.174,171.272 41.783,171.272 41.808,171.272 45.085,167.995 45.085,164.609 52.822,164.609 55.245,167.032 55.245,167.132 ; 27.813,174.422 26.13,174.422 25.576,173.868 25.576,155.653 31.623,149.606 27.092,145.075 27.092,140.887 27.245,140.734 28.125,140.734 28.321,140.538 31.039,140.538 31.241,140.336 31.791,139.786 31.791,139.776 34.907,136.66 45.202,136.66 45.722,137.18 46.883,137.18 47.244,137.541 ; 27.813,241.757 32.512,241.757 32.537,241.757 33.231,242.451 36.441,242.451 36.83,242.062 37.211,242.062 37.211,243.332 38.599,243.332 40.174,241.757 41.783,241.757 41.808,241.757 45.085,238.48 45.085,235.094 52.822,235.094 55.245,237.517 55.245,237.617 ; 27.813,244.907 26.13,244.907 25.576,244.353 25.576,226.138 31.623,220.091 27.092,215.56 27.092,211.372 27.245,211.219 28.125,211.219 28.321,211.023 31.039,211.023 31.241,210.821 31.791,210.271 31.791,210.261 34.907,207.145 45.202,207.145 45.722,207.665 46.883,207.665 47.244,208.026 ; 28.321,143.688 33.02,143.688 ; 28.321,214.173 33.02,214.173 ; 31.623,152.146 31.623,151.845 33.02,150.448 33.02,150.421 33.187,150.254 33.187,148.958 33.02,148.791 33.02,143.688 ; 31.623,222.631 31.623,222.33 33.02,220.933 33.02,220.906 33.187,220.739 33.187,219.443 33.02,219.276 33.02,214.173 ; 32.512,174.422 32.487,174.422 31.283,175.626 25.908,175.626 24.568,174.286 24.568,141.985 31.933,134.62 49.359,134.62 49.784,135.045 49.784,137.541 49.784,137.587 48.316,139.055 46.172,139.055 ; 32.512,244.907 32.487,244.907 31.283,246.111 25.908,246.111 24.568,244.771 24.568,212.47 31.933,205.105 49.359,205.105 49.784,205.53 49.784,208.026 49.784,208.072 48.316,209.54 46.172,209.54 ; 33.02,140.538 33.045,140.538 35.915,137.668 44.785,137.668 46.172,139.055 ; 33.02,211.023 33.045,211.023 35.915,208.153 44.785,208.153 46.172,209.54 ; 36.703,150.876 36.849,150.876 38.354,149.371 38.354,147.232 38.652,146.935 43.819,146.935 44.704,146.05 44.704,140.716 46.172,139.248 46.172,139.055 ; 36.703,153.416 36.703,153.605 41.656,158.558 41.656,159.087 41.954,159.385 49.911,159.385 53.213,156.083 57.404,156.083 60.071,158.75 ; 36.703,163.576 40.723,163.576 41.402,162.897 41.402,160.826 41.7,160.528 50.727,160.528 56.649,166.45 56.649,167.386 56.642,167.393 56.642,167.821 55.125,169.337 47.96,169.337 46.101,171.196 46.101,172.92 45.803,173.218 40.603,173.218 39.399,174.422 37.211,174.422 ; 36.703,221.361 36.849,221.361 38.354,219.856 38.354,217.717 38.652,217.42 43.819,217.42 44.704,216.535 44.704,211.201 46.172,209.733 46.172,209.54 ; 36.703,223.901 36.703,224.09 41.656,229.043 41.656,229.572 41.954,229.87 49.911,229.87 53.213,226.568 57.404,226.568 60.071,229.235 ; 36.703,234.061 40.723,234.061 41.402,233.382 41.402,231.311 41.7,231.013 50.727,231.013 56.649,236.935 56.649,237.871 56.642,237.878 56.642,238.306 55.125,239.822 47.96,239.822 46.101,241.681 46.101,243.405 45.803,243.703 40.603,243.703 39.399,244.907 37.211,244.907 ; 41.402,140.538 41.427,140.538 41.623,140.734 41.623,140.759 42.631,141.767 42.631,144.45 42.189,144.892 34.857,144.892 34.163,145.586 34.163,148.509 34.195,148.541 34.195,150.671 34.163,150.703 34.163,150.731 33.187,151.707 33.187,154.038 33.187,163.282 31.623,164.846 27.686,164.846 26.584,165.948 26.584,172.834 26.968,173.218 28.6,173.218 28.844,172.974 34.671,172.974 35.814,174.117 35.814,175.597 36.112,175.895 40.285,175.895 41.758,174.422 41.783,174.422 48.336,174.422 48.685,174.073 48.685,171.24 48.641,171.196 ; 41.402,143.688 37.592,143.688 33.02,143.688 ; 41.402,211.023 41.427,211.023 41.623,211.219 41.623,211.244 42.631,212.252 42.631,214.935 42.189,215.377 34.857,215.377 34.163,216.071 34.163,218.994 34.195,219.026 34.195,221.156 34.163,221.188 34.163,221.216 33.187,222.192 33.187,224.523 33.187,233.767 31.623,235.331 27.686,235.331 26.584,236.433 26.584,243.319 26.968,243.703 28.6,243.703 28.844,243.459 34.671,243.459 35.814,244.602 35.814,246.082 36.112,246.38 40.285,246.38 41.758,244.907 41.783,244.907 48.336,244.907 48.685,244.558 48.685,241.725 48.641,241.681 ; 41.402,214.173 37.592,214.173 33.02,214.173 ; 42.8,157.209 42.8,156.709 40.904,154.813 40.904,148.507 41.202,148.209 49.022,148.209 49.149,148.336 49.149,146.939 52.401,143.687 52.401,143.26 55.961,139.7 56.007,139.7 ; 42.8,227.694 42.8,227.194 40.904,225.298 40.904,218.992 41.202,218.694 49.022,218.694 49.149,218.821 49.149,217.424 52.401,214.172 52.401,213.745 55.961,210.185 56.007,210.185 ; 43.307,150.114 43.307,152.646 47.37,156.709 47.37,157.209 ; 43.307,220.599 43.307,223.131 47.37,227.194 47.37,227.694 ; 113.665,239.725 118.364,239.725 118.389,239.725 119.083,240.419 122.293,240.419 122.682,240.03 123.063,240.03 123.063,241.3 124.451,241.3 126.026,239.725 127.635,239.725 127.66,239.725 130.937,236.448 130.937,233.062 138.674,233.062 141.097,235.485 141.097,235.585 ; 113.665,242.875 111.982,242.875 111.428,242.321 111.428,224.106 117.475,218.059 112.944,213.528 112.944,209.34 113.097,209.187 113.977,209.187 114.173,208.991 116.891,208.991 117.093,208.789 117.643,208.239 117.643,208.229 120.759,205.113 131.054,205.113 131.574,205.633 132.735,205.633 133.096,205.994 ; 114.173,212.141 118.872,212.141 ; 115.189,171.272 119.888,171.272 119.913,171.272 120.607,171.966 123.817,171.966 124.206,171.577 124.587,171.577 124.587,172.847 125.975,172.847 127.55,171.272 129.159,171.272 129.184,171.272 132.461,167.995 132.461,164.609 140.198,164.609 142.621,167.032 142.621,167.132 ; 115.189,174.422 113.506,174.422 112.952,173.868 112.952,155.653 118.999,149.606 114.468,145.075 114.468,140.887 114.621,140.734 115.501,140.734 115.697,140.538 118.415,140.538 118.617,140.336 119.167,139.786 119.167,139.776 122.283,136.66 132.578,136.66 133.098,137.18 134.259,137.18 134.62,137.541 ; 115.697,143.688 120.396,143.688 ; 117.475,220.599 117.475,220.298 118.872,218.901 118.872,218.874 119.039,218.707 119.039,217.411 118.872,217.244 118.872,212.141 ; 118.11,90.246 122.809,90.246 122.834,90.246 123.528,90.94 126.738,90.94 127.127,90.551 127.508,90.551 127.508,91.821 128.896,91.821 130.471,90.246 132.08,90.246 132.105,90.246 135.382,86.969 135.382,83.583 143.119,83.583 145.542,86.006 145.542,86.106 ; 118.11,93.396 116.427,93.396 115.873,92.842 115.873,74.627 121.92,68.58 117.389,64.049 117.389,59.861 117.542,59.708 118.422,59.708 118.618,59.512 121.336,59.512 121.538,59.31 122.088,58.76 122.088,58.75 125.204,55.634 135.499,55.634 136.019,56.154 137.18,56.154 137.541,56.515 ; 118.364,242.875 118.339,242.875 117.135,244.079 111.76,244.079 110.42,242.739 110.42,210.438 117.785,203.073 135.211,203.073 135.636,203.498 135.636,205.994 135.636,206.04 134.168,207.508 132.024,207.508 ; 118.618,62.662 123.317,62.662 ; 118.872,208.991 118.897,208.991 121.767,206.121 130.637,206.121 132.024,207.508 ; 118.999,152.146 118.999,151.845 120.396,150.448 120.396,150.421 120.563,150.254 120.563,148.958 120.396,148.791 120.396,143.688 ; 119.888,174.422 119.863,174.422 118.659,175.626 113.284,175.626 111.944,174.286 111.944,141.985 119.309,134.62 136.735,134.62 137.16,135.045 137.16,137.541 137.16,137.587 135.692,139.055 133.548,139.055 ; 120.396,140.538 120.421,140.538 123.291,137.668 132.161,137.668 133.548,139.055 ; 121.92,71.12 121.92,70.819 123.317,69.422 123.317,69.395 123.484,69.228 123.484,67.932 123.317,67.765 123.317,62.662 ; 122.555,219.329 122.701,219.329 124.206,217.824 124.206,215.685 124.504,215.388 129.671,215.388 130.556,214.503 130.556,209.169 132.024,207.701 132.024,207.508 ; 122.555,221.869 122.555,222.058 127.508,227.011 127.508,227.54 127.806,227.838 135.763,227.838 139.065,224.536 143.256,224.536 145.923,227.203 ; 122.555,232.029 126.575,232.029 127.254,231.35 127.254,229.279 127.552,228.981 136.579,228.981 142.501,234.903 142.501,235.839 142.494,235.846 142.494,236.274 140.977,237.79 133.812,237.79 131.953,239.649 131.953,241.373 131.655,241.671 126.455,241.671 125.251,242.875 123.063,242.875 ; 122.809,93.396 122.784,93.396 121.58,94.6 116.205,94.6 114.865,93.26 114.865,60.959 122.23,53.594 139.656,53.594 140.081,54.019 140.081,56.515 140.081,56.561 138.613,58.029 136.469,58.029 ; 123.317,59.512 123.342,59.512 126.212,56.642 135.082,56.642 136.469,58.029 ; 124.079,150.876 124.225,150.876 125.73,149.371 125.73,147.232 126.028,146.935 131.195,146.935 132.08,146.05 132.08,140.716 133.548,139.248 133.548,139.055 ; 124.079,153.416 124.079,153.605 129.032,158.558 129.032,159.087 129.33,159.385 137.287,159.385 140.589,156.083 144.78,156.083 147.447,158.75 ; 124.079,163.576 128.099,163.576 128.778,162.897 128.778,160.826 129.076,160.528 138.103,160.528 144.025,166.45 144.025,167.386 144.018,167.393 144.018,167.821 142.501,169.337 135.336,169.337 133.477,171.196 133.477,172.92 133.179,173.218 127.979,173.218 126.775,174.422 124.587,174.422 ; 127,69.85 127.146,69.85 128.651,68.345 128.651,66.206 128.949,65.909 134.116,65.909 135.001,65.024 135.001,59.69 136.469,58.222 136.469,58.029 ; 127,72.39 127,72.579 131.953,77.532 131.953,78.061 132.251,78.359 140.208,78.359 143.51,75.057 147.701,75.057 150.368,77.724 ; 127,82.55 131.02,82.55 131.699,81.871 131.699,79.8 131.997,79.502 141.024,79.502 146.946,85.424 146.946,86.36 146.939,86.367 146.939,86.795 145.422,88.311 138.257,88.311 136.398,90.17 136.398,91.894 136.1,92.192 130.9,92.192 129.696,93.396 127.508,93.396 ; 127.254,208.991 127.279,208.991 127.475,209.187 127.475,209.212 128.483,210.22 128.483,212.903 128.041,213.345 120.709,213.345 120.015,214.039 120.015,216.962 120.047,216.994 120.047,219.124 120.015,219.156 120.015,219.184 119.039,220.16 119.039,222.491 119.039,231.735 117.475,233.299 113.538,233.299 112.436,234.401 112.436,241.287 112.82,241.671 114.452,241.671 114.696,241.427 120.523,241.427 121.666,242.57 121.666,244.05 121.964,244.348 126.137,244.348 127.61,242.875 127.635,242.875 134.188,242.875 134.537,242.526 134.537,239.693 134.493,239.649 ; 127.254,212.141 123.444,212.141 118.872,212.141 ; 128.652,225.662 128.652,225.162 126.756,223.266 126.756,216.96 127.054,216.662 134.874,216.662 135.001,216.789 135.001,215.392 138.253,212.14 138.253,211.713 141.813,208.153 141.859,208.153 ; 128.778,140.538 128.803,140.538 128.999,140.734 128.999,140.759 130.007,141.767 130.007,144.45 129.565,144.892 122.233,144.892 121.539,145.586 121.539,148.509 121.571,148.541 121.571,150.671 121.539,150.703 121.539,150.731 120.563,151.707 120.563,154.038 120.563,163.282 118.999,164.846 115.062,164.846 113.96,165.948 113.96,172.834 114.344,173.218 115.976,173.218 116.22,172.974 122.047,172.974 123.19,174.117 123.19,175.597 123.488,175.895 127.661,175.895 129.134,174.422 129.159,174.422 135.712,174.422 136.061,174.073 136.061,171.24 136.017,171.196 ; 128.778,143.688 124.968,143.688 120.396,143.688 ; 129.159,218.567 129.159,221.099 133.222,225.162 133.222,225.662 ; 130.176,157.209 130.176,156.709 128.28,154.813 128.28,148.507 128.578,148.209 136.398,148.209 136.525,148.336 136.525,146.939 139.777,143.687 139.777,143.26 143.337,139.7 143.383,139.7 ; 130.683,150.114 130.683,152.646 134.746,156.709 134.746,157.209 ; 131.699,59.512 131.724,59.512 131.92,59.708 131.92,59.733 132.928,60.741 132.928,63.424 132.486,63.866 125.154,63.866 124.46,64.56 124.46,67.483 124.492,67.515 124.492,69.645 124.46,69.677 124.46,69.705 123.484,70.681 123.484,73.012 123.484,82.256 121.92,83.82 117.983,83.82 116.881,84.922 116.881,91.808 117.265,92.192 118.897,92.192 119.141,91.948 124.968,91.948 126.111,93.091 126.111,94.571 126.409,94.869 130.582,94.869 132.055,93.396 132.08,93.396 138.633,93.396 138.982,93.047 138.982,90.214 138.938,90.17 ; 131.699,62.662 127.889,62.662 123.317,62.662 ; 133.097,76.183 133.097,75.683 131.201,73.787 131.201,67.481 131.499,67.183 139.319,67.183 139.446,67.31 139.446,65.913 142.698,62.661 142.698,62.234 146.258,58.674 146.304,58.674 ; 133.604,69.088 133.604,71.62 137.667,75.683 137.667,76.183
  Bottom Layer w0.508: 31.623,152.146 30.059,150.582 30.059,139.867 33.782,136.144 33.782,135.807 34.08,135.509 52.915,135.509 53.213,135.807 53.213,140.843 54.61,142.24 56.007,142.24 56.051,142.284 59.817,142.284 59.817,142.367 61.087,143.637 63.627,146.177 63.627,146.304 65.786,148.463 65.786,171.406 65.252,171.94 56.37,171.94 52.705,168.275 52.705,167.132 ; 31.623,154.686 29.051,157.258 29.051,167.989 32.004,170.942 43.769,170.942 46.863,167.848 46.863,167.714 48.969,165.608 56.471,165.608 56.769,165.906 56.769,169.12 57.067,169.418 60.325,169.418 ; 31.623,157.226 33.274,155.575 33.274,148.507 33.572,148.209 36.576,148.209 36.703,148.336 44.169,148.336 45.847,150.014 ; 31.623,159.766 31.623,159.86 33.155,161.392 33.155,161.626 33.187,161.658 33.187,165.494 33.155,165.526 33.155,167.366 34.715,168.926 42.148,168.926 47.482,163.592 59.227,163.592 59.256,163.621 59.862,163.621 60.071,163.83 ; 31.623,162.306 31.452,162.477 30.059,162.477 30.059,166.965 33.028,169.934 43.053,169.934 48.387,164.6 58.301,164.6 60.071,166.37 ; 31.623,222.631 30.059,221.067 30.059,210.352 33.782,206.629 33.782,206.292 34.08,205.994 52.915,205.994 53.213,206.292 53.213,211.328 54.61,212.725 56.007,212.725 56.051,212.769 59.817,212.769 59.817,212.852 61.087,214.122 63.627,216.662 63.627,216.789 65.786,218.948 65.786,241.891 65.252,242.425 56.37,242.425 52.705,238.76 52.705,237.617 ; 31.623,225.171 29.051,227.743 29.051,238.474 32.004,241.427 43.769,241.427 46.863,238.333 46.863,238.199 48.969,236.093 56.471,236.093 56.769,236.391 56.769,239.605 57.067,239.903 60.325,239.903 ; 31.623,227.711 33.274,226.06 33.274,218.992 33.572,218.694 36.576,218.694 36.703,218.821 44.169,218.821 45.847,220.499 ; 31.623,230.251 31.623,230.345 33.155,231.877 33.155,232.111 33.187,232.143 33.187,235.979 33.155,236.011 33.155,237.851 34.715,239.411 42.148,239.411 47.482,234.077 59.227,234.077 59.256,234.106 59.862,234.106 60.071,234.315 ; 31.623,232.791 31.452,232.962 30.059,232.962 30.059,237.45 33.028,240.419 43.053,240.419 48.387,235.085 58.301,235.085 60.071,236.855 ; 36.703,155.956 34.969,155.956 34.163,156.762 34.163,161.258 34.195,161.29 34.195,165.911 34.163,165.943 34.163,166.949 35.108,167.894 41.148,167.894 46.458,162.584 58.777,162.584 60.071,161.29 ; 36.703,158.496 41.148,158.496 43.307,156.337 43.307,151.384 ; 36.703,161.036 36.916,161.249 37.678,161.249 37.973,161.544 57.868,161.544 58.42,160.992 58.42,157.607 60.325,155.702 ; 36.703,226.441 34.969,226.441 34.163,227.247 34.163,231.743 34.195,231.775 34.195,236.396 34.163,236.428 34.163,237.434 35.108,238.379 41.148,238.379 46.458,233.069 58.777,233.069 60.071,231.775 ; 36.703,228.981 41.148,228.981 43.307,226.822 43.307,221.869 ; 36.703,231.521 36.916,231.734 37.678,231.734 37.973,232.029 57.868,232.029 58.42,231.477 58.42,228.092 60.325,226.187 ; 43.307,150.114 43.307,151.384 ; 43.307,220.599 43.307,221.869 ; 45.847,150.114 45.847,150.014 ; 45.847,220.599 45.847,220.499 ; 49.403,143.129 49.403,154.609 53.594,158.8 ; 49.403,213.614 49.403,225.094 53.594,229.285 ; 53.594,146 58.37,146 61.087,148.717 ; 53.594,216.485 58.37,216.485 61.087,219.202 ; 55.245,167.132 55.162,167.215 55.162,168.91 55.201,168.91 55.499,169.208 55.499,169.276 57.155,170.932 64.244,170.932 64.778,170.398 64.778,149.868 61.087,146.177 61.041,146.177 59.009,144.145 52.705,144.145 51.943,143.383 51.943,141.732 50.8,140.589 47.371,140.589 46.863,141.097 46.863,143.129 46.863,143.764 45.847,144.78 45.847,150.014 ; 55.245,237.617 55.162,237.7 55.162,239.395 55.201,239.395 55.499,239.693 55.499,239.761 57.155,241.417 64.244,241.417 64.778,240.883 64.778,220.353 61.087,216.662 61.041,216.662 59.009,214.63 52.705,214.63 51.943,213.868 51.943,212.217 50.8,211.074 47.371,211.074 46.863,211.582 46.863,213.614 46.863,214.249 45.847,215.265 45.847,220.499 ; 62.865,169.418 62.865,155.702 62.865,150.368 61.214,148.717 61.087,148.717 ; 62.865,239.903 62.865,226.187 62.865,220.853 61.214,219.202 61.087,219.202 ; 117.475,220.599 115.911,219.035 115.911,208.32 119.634,204.597 119.634,204.26 119.932,203.962 138.767,203.962 139.065,204.26 139.065,209.296 140.462,210.693 141.859,210.693 141.903,210.737 145.669,210.737 145.669,210.82 146.939,212.09 149.479,214.63 149.479,214.757 151.638,216.916 151.638,239.859 151.104,240.393 142.222,240.393 138.557,236.728 138.557,235.585 ; 117.475,223.139 114.903,225.711 114.903,236.442 117.856,239.395 129.621,239.395 132.715,236.301 132.715,236.167 134.821,234.061 142.323,234.061 142.621,234.359 142.621,237.573 142.919,237.871 146.177,237.871 ; 117.475,225.679 119.126,224.028 119.126,216.96 119.424,216.662 122.428,216.662 122.555,216.789 130.021,216.789 131.699,218.467 ; 117.475,228.219 117.475,228.313 119.007,229.845 119.007,230.079 119.039,230.111 119.039,233.947 119.007,233.979 119.007,235.819 120.567,237.379 128,237.379 133.334,232.045 145.079,232.045 145.108,232.074 145.714,232.074 145.923,232.283 ; 117.475,230.759 117.304,230.93 115.911,230.93 115.911,235.418 118.88,238.387 128.905,238.387 134.239,233.053 144.153,233.053 145.923,234.823 ; 118.999,152.146 117.435,150.582 117.435,139.867 121.158,136.144 121.158,135.807 121.456,135.509 140.291,135.509 140.589,135.807 140.589,140.843 141.986,142.24 143.383,142.24 143.427,142.284 147.193,142.284 147.193,142.367 148.463,143.637 151.003,146.177 151.003,146.304 153.162,148.463 153.162,171.406 152.628,171.94 143.746,171.94 140.081,168.275 140.081,167.132 ; 118.999,154.686 116.427,157.258 116.427,167.989 119.38,170.942 131.145,170.942 134.239,167.848 134.239,167.714 136.345,165.608 143.847,165.608 144.145,165.906 144.145,169.12 144.443,169.418 147.701,169.418 ; 118.999,157.226 120.65,155.575 120.65,148.507 120.948,148.209 123.952,148.209 124.079,148.336 131.545,148.336 133.223,150.014 ; 118.999,159.766 118.999,159.86 120.531,161.392 120.531,161.626 120.563,161.658 120.563,165.494 120.531,165.526 120.531,167.366 122.091,168.926 129.524,168.926 134.858,163.592 146.603,163.592 146.632,163.621 147.238,163.621 147.447,163.83 ; 118.999,162.306 118.828,162.477 117.435,162.477 117.435,166.965 120.404,169.934 130.429,169.934 135.763,164.6 145.677,164.6 147.447,166.37 ; 121.92,71.12 120.356,69.556 120.356,58.841 124.079,55.118 124.079,54.781 124.377,54.483 143.212,54.483 143.51,54.781 143.51,59.817 144.907,61.214 146.304,61.214 146.348,61.258 150.114,61.258 150.114,61.341 151.384,62.611 153.924,65.151 153.924,65.278 156.083,67.437 156.083,90.38 155.549,90.914 146.667,90.914 143.002,87.249 143.002,86.106 ; 121.92,73.66 119.348,76.232 119.348,86.963 122.301,89.916 134.066,89.916 137.16,86.822 137.16,86.688 139.266,84.582 146.768,84.582 147.066,84.88 147.066,88.094 147.364,88.392 150.622,88.392 ; 121.92,76.2 123.571,74.549 123.571,67.481 123.869,67.183 126.873,67.183 127,67.31 134.466,67.31 136.144,68.988 ; 121.92,78.74 121.92,78.834 123.452,80.366 123.452,80.6 123.484,80.632 123.484,84.468 123.452,84.5 123.452,86.34 125.012,87.9 132.445,87.9 137.779,82.566 149.524,82.566 149.553,82.595 150.159,82.595 150.368,82.804 ; 121.92,81.28 121.749,81.451 120.356,81.451 120.356,85.939 123.325,88.908 133.35,88.908 138.684,83.574 148.598,83.574 150.368,85.344 ; 122.555,224.409 120.821,224.409 120.015,225.215 120.015,229.711 120.047,229.743 120.047,234.364 120.015,234.396 120.015,235.402 120.96,236.347 127,236.347 132.31,231.037 144.629,231.037 145.923,229.743 ; 122.555,226.949 127,226.949 129.159,224.79 129.159,219.837 ; 122.555,229.489 122.768,229.702 123.53,229.702 123.825,229.997 143.72,229.997 144.272,229.445 144.272,226.06 146.177,224.155 ; 124.079,155.956 122.345,155.956 121.539,156.762 121.539,161.258 121.571,161.29 121.571,165.911 121.539,165.943 121.539,166.949 122.484,167.894 128.524,167.894 133.834,162.584 146.153,162.584 147.447,161.29 ; 124.079,158.496 128.524,158.496 130.683,156.337 130.683,151.384 ; 124.079,161.036 124.292,161.249 125.054,161.249 125.349,161.544 145.244,161.544 145.796,160.992 145.796,157.607 147.701,155.702 ; 127,74.93 125.266,74.93 124.46,75.736 124.46,80.232 124.492,80.264 124.492,84.885 124.46,84.917 124.46,85.923 125.405,86.868 131.445,86.868 136.755,81.558 149.074,81.558 150.368,80.264 ; 127,77.47 131.445,77.47 133.604,75.311 133.604,70.358 ; 127,80.01 127.213,80.223 127.975,80.223 128.27,80.518 148.165,80.518 148.717,79.966 148.717,76.581 150.622,74.676 ; 129.159,218.567 129.159,219.837 ; 130.683,150.114 130.683,151.384 ; 131.699,218.567 131.699,218.467 ; 133.223,150.114 133.223,150.014 ; 133.604,69.088 133.604,70.358 ; 135.255,211.582 135.255,223.062 139.446,227.253 ; 136.144,69.088 136.144,68.988 ; 136.779,143.129 136.779,154.609 140.97,158.8 ; 139.446,214.453 144.222,214.453 146.939,217.17 ; 139.7,62.103 139.7,73.583 143.891,77.774 ; 140.97,146 145.746,146 148.463,148.717 ; 141.097,235.585 141.014,235.668 141.014,237.363 141.053,237.363 141.351,237.661 141.351,237.729 143.007,239.385 150.096,239.385 150.63,238.851 150.63,218.321 146.939,214.63 146.893,214.63 144.861,212.598 138.557,212.598 137.795,211.836 137.795,210.185 136.652,209.042 133.223,209.042 132.715,209.55 132.715,211.582 132.715,212.217 131.699,213.233 131.699,218.467 ; 142.621,167.132 142.538,167.215 142.538,168.91 142.577,168.91 142.875,169.208 142.875,169.276 144.531,170.932 151.62,170.932 152.154,170.398 152.154,149.868 148.463,146.177 148.417,146.177 146.385,144.145 140.081,144.145 139.319,143.383 139.319,141.732 138.176,140.589 134.747,140.589 134.239,141.097 134.239,143.129 134.239,143.764 133.223,144.78 133.223,150.014 ; 143.891,64.974 148.667,64.974 151.384,67.691 ; 145.542,86.106 145.459,86.189 145.459,87.884 145.498,87.884 145.796,88.182 145.796,88.25 147.452,89.906 154.541,89.906 155.075,89.372 155.075,68.842 151.384,65.151 151.338,65.151 149.306,63.119 143.002,63.119 142.24,62.357 142.24,60.706 141.097,59.563 137.668,59.563 137.16,60.071 137.16,62.103 137.16,62.738 136.144,63.754 136.144,68.988 ; 148.717,237.871 148.717,224.155 148.717,218.821 147.066,217.17 146.939,217.17 ; 150.241,169.418 150.241,155.702 150.241,150.368 148.59,148.717 148.463,148.717 ; 153.162,88.392 153.162,74.676 153.162,69.342 151.511,67.691 151.384,67.691 ; 43.307,151.384 52.197,160.274 52.941,160.274 52.971,160.304 55.298,160.304 55.626,159.976 55.626,152.527 59.436,148.717 61.087,148.717 ; 43.307,221.869 52.197,230.759 52.941,230.759 52.971,230.789 55.298,230.789 55.626,230.461 55.626,223.012 59.436,219.202 61.087,219.202 ; 129.159,219.837 138.049,228.727 138.793,228.727 138.823,228.757 141.15,228.757 141.478,228.429 141.478,220.98 145.288,217.17 146.939,217.17 ; 130.683,151.384 139.573,160.274 140.317,160.274 140.347,160.304 142.674,160.304 143.002,159.976 143.002,152.527 146.812,148.717 148.463,148.717 ; 133.604,70.358 142.494,79.248 143.238,79.248 143.268,79.278 145.595,79.278 145.923,78.95 145.923,71.501 149.733,67.691 151.384,67.691
  other v1: 114.554,53.848 155.829,53.848 25.654,55.499 66.929,55.499 155.702,96.012 114.427,96.139 66.802,97.663 25.527,97.79 24.257,134.874 65.532,134.874 111.633,134.874 152.908,134.874 65.405,177.038 152.781,177.038 24.13,177.165 111.506,177.165 110.109,203.327 151.384,203.327 24.257,205.359 65.532,205.359 151.257,245.491 109.982,245.618 65.405,247.523 24.13,247.65

## Polygon pours and split planes (outlines as drawn)
no net on Bottom Layer "NONET_L02_P014" (solid, pour order 14): 108.839,246.888 108.839,202.057 152.781,202.057 152.781,246.888
no net on Bottom Layer "NONET_L02_P012" (solid, pour order 12): 22.987,248.92 22.987,204.089 66.929,204.089 66.929,248.92
no net on Bottom Layer "NONET_L02_P010" (solid, pour order 10): 110.363,178.435 110.363,133.604 154.305,133.604 154.305,178.435
no net on Bottom Layer "NONET_L02_P008" (solid, pour order 8): 22.987,178.435 22.987,133.604 66.929,133.604 66.929,178.435
no net on Bottom Layer "NONET_L02_P006" (solid, pour order 6): 113.284,97.409 113.284,52.578 157.226,52.578 157.226,97.409
no net on Bottom Layer "NONET_L02_P002" (solid, pour order 2): 24.384,99.06 24.384,54.229 68.326,54.229 68.326,99.06
no net on Top Layer "NONET_L01_P015" (solid, pour order 15): 108.839,246.888 108.839,202.057 152.781,202.057 152.781,246.888
no net on Top Layer "NONET_L01_P013" (solid, pour order 13): 22.987,248.92 22.987,204.089 66.929,204.089 66.929,248.92
no net on Top Layer "NONET_L01_P011" (solid, pour order 11): 110.363,178.435 110.363,133.604 154.305,133.604 154.305,178.435
no net on Top Layer "NONET_L01_P009" (solid, pour order 9): 22.987,178.435 22.987,133.604 66.929,133.604 66.929,178.435
no net on Top Layer "NONET_L01_P007" (solid, pour order 7): 113.284,97.409 113.284,52.578 157.226,52.578 157.226,97.409
no net on Top Layer "NONET_L01_P003" (solid, pour order 3): 24.384,99.06 24.384,54.229 68.326,54.229 68.326,99.06

## Keep-outs
Keep-Out Layer:
  lines w1.27: -12.007,0 197.993,0 197.993,297 -12.007,297 -12.007,0

## Silkscreen, mask and mechanical layers (free items; w line width, h text height)
Mechanical 13:
  lines w0.254: 22.987,133.604 66.929,133.604 66.929,178.435 22.987,178.435 22.987,133.604 ; 22.987,204.089 66.929,204.089 66.929,248.92 22.987,248.92 22.987,204.089 ; 24.384,54.229 68.326,54.229 68.326,99.06 24.384,99.06 24.384,54.229 ; 108.839,202.057 152.781,202.057 152.781,246.888 108.839,246.888 108.839,202.057 ; 110.363,133.604 154.305,133.604 154.305,178.435 110.363,178.435 110.363,133.604 ; 113.284,52.578 157.226,52.578 157.226,97.409 113.284,97.409 113.284,52.578